# Altium PCB pulser.PcbDoc
Units mm, origin at the board's own origin, x right, y up, seen from the top; angles counter-clockwise.
Board outline 45.59 x 25.65 mm, 2 copper layers (Top Layer, Bottom Layer); 39 components, 24 nets, 111 pads, 25 vias.
Unrouted connection lines stored in the file: 7.
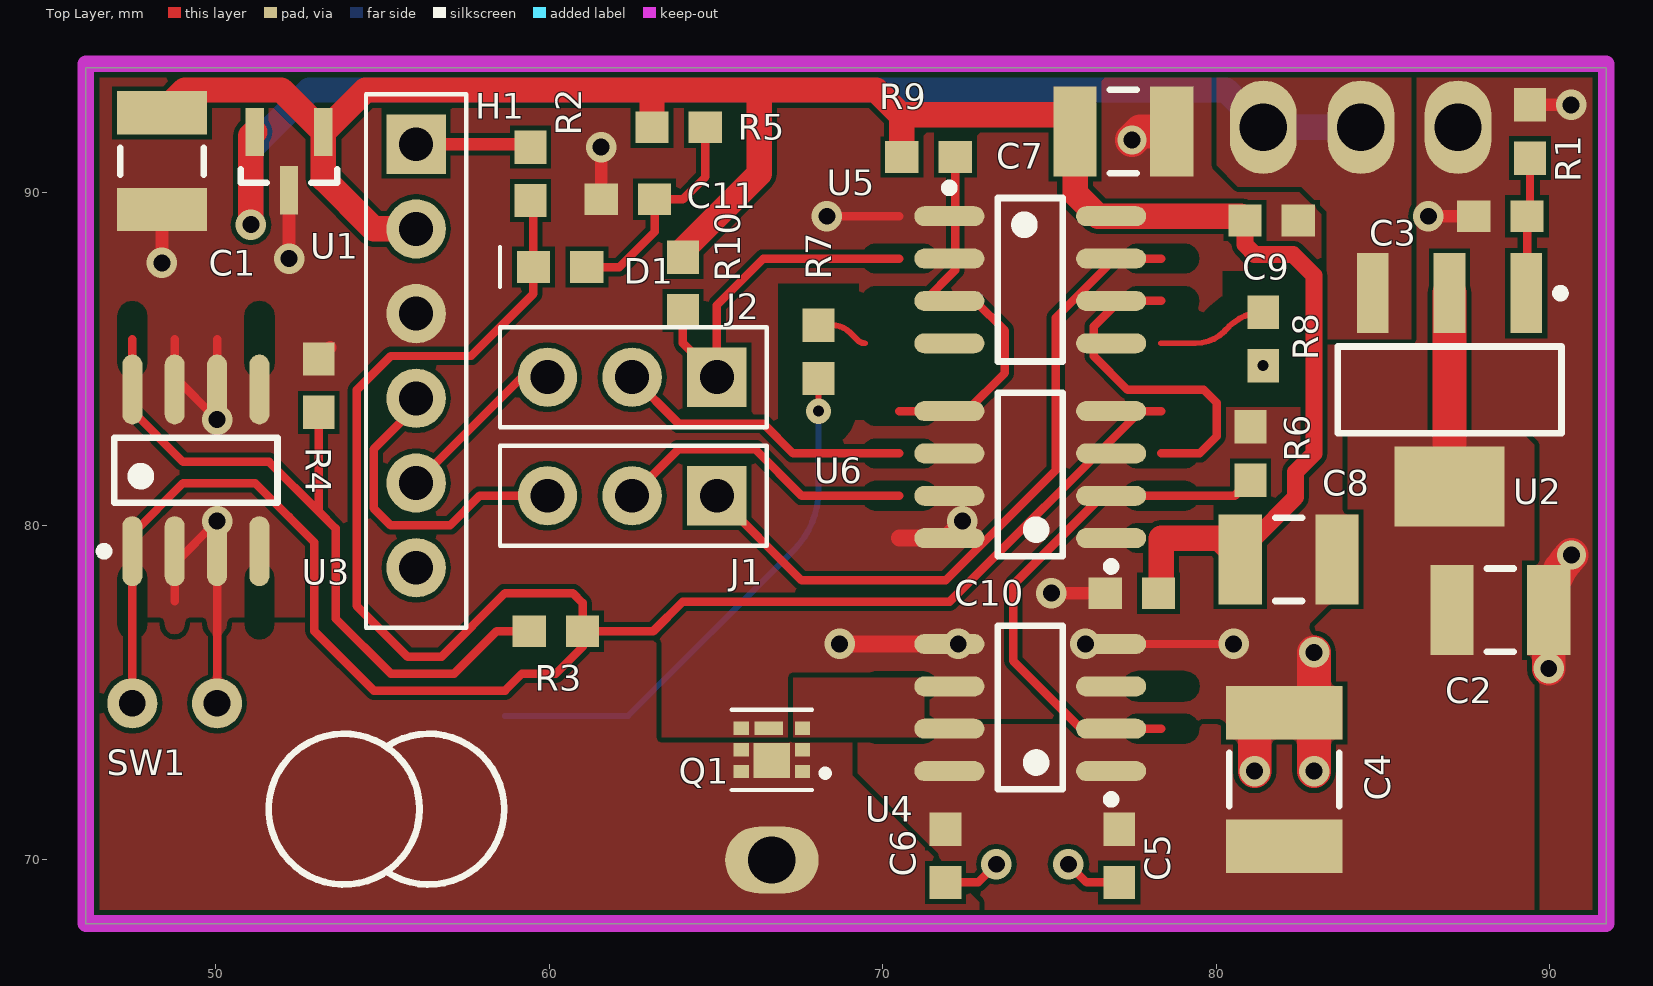
[diagram p0: Top Layer view]
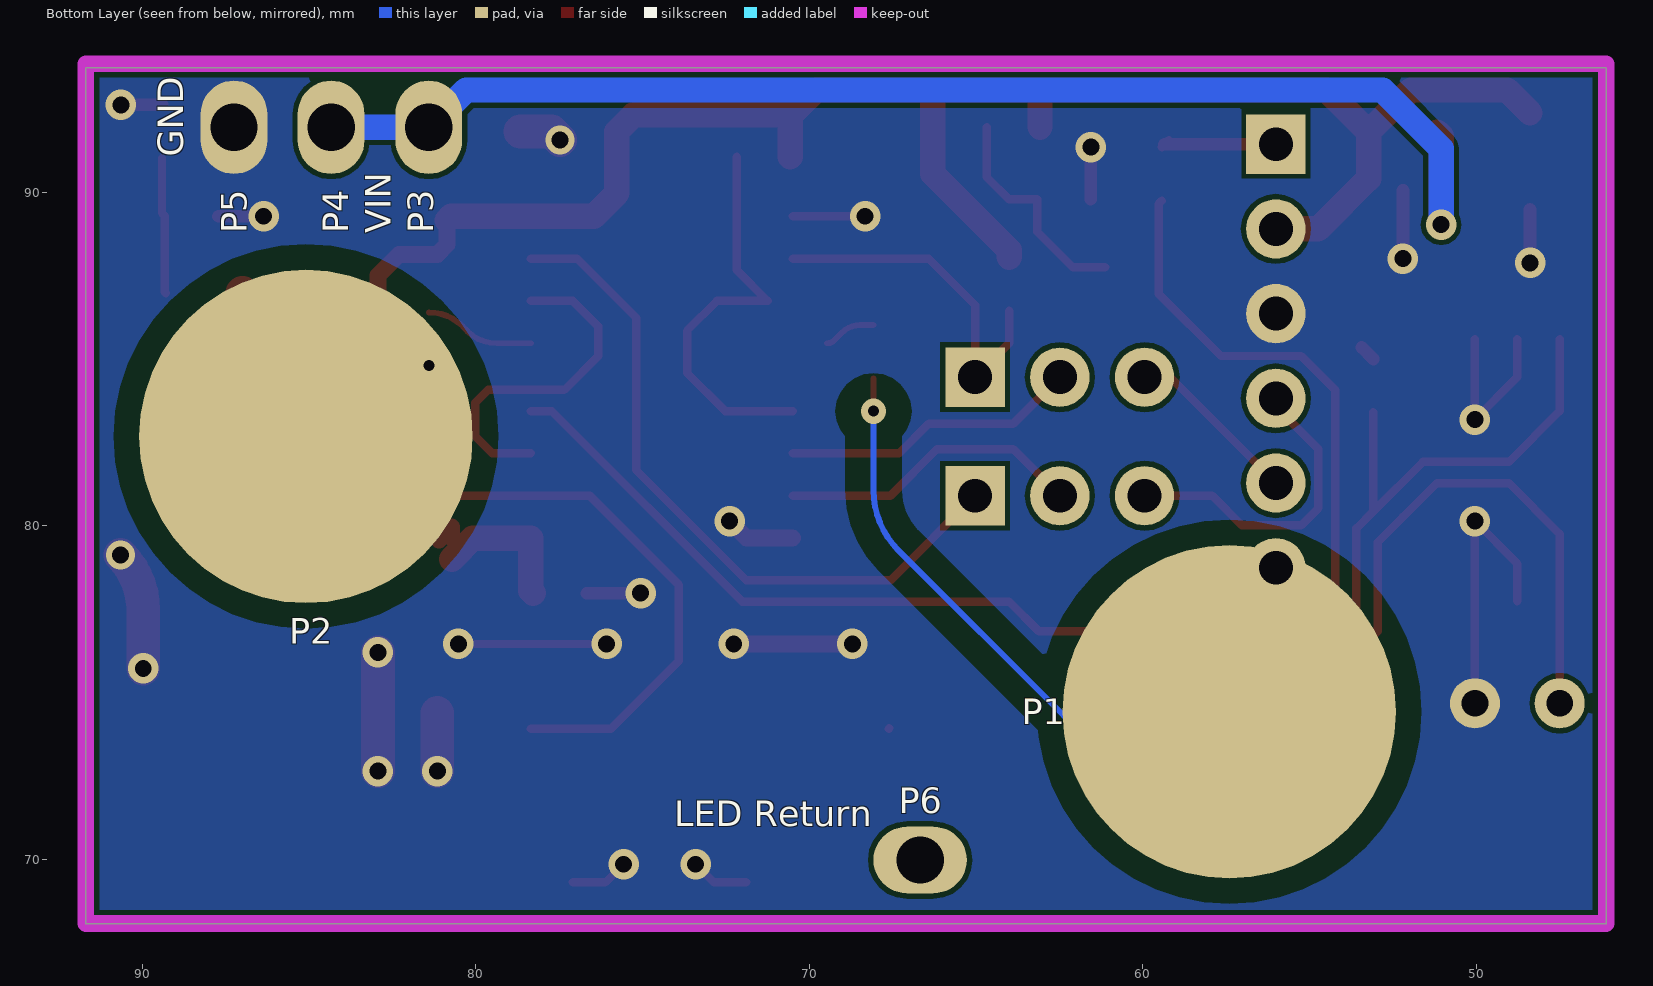
[diagram p1: Bottom Layer view, seen from below]

## Layer stack, top to bottom
Top Solder: solder mask 0.0102, Solder Resist, Dk 3.5
Top Layer: signal copper 0.0356
Dielectric1: core 0.32, FR-4, Dk 4.8
Bottom Layer: signal copper 0.0356
Bottom Solder: solder mask 0.0102, Solder Resist, Dk 3.5

## Board outline
91.694,68.072 91.694,93.726 46.101,93.726 46.101,68.072

## Design rules (kind name [scope] priority, off if disabled: settings)
Clearance ClearanceCapsense [InNetClass('capsense') vs not(InNetClass('capsense'))] p1: gap=0.75
Clearance [All] p2: gap=0.152
HoleSize [All] p1: absolutevalues=TRUE maxlimit=2.54 minlimit=0.33 maxpercent=80.000 minpercent=20.000
MinimumAnnularRing [All] p1: minimumring=0.178
PolygonConnect [All] p1: connectstyle=Direct reliefconductorwidth=0.254 reliefentries=4 polygonreliefangle="90 Angle" airgapwidth=0.254
RoutingVias [All] p1: holewidth=0.254 width=0.61 viastyle="Through Hole" minholewidth=0.254 minwidth=0.61 maxholewidth=0.711 maxwidth=1.27
SilkToSolderMaskClearance SilkscreenOverComponentPads [IsPad] p1: minsilkscreentomaskgap=0.254 clearancetoexposedcopper=TRUE
SolderMaskExpansion SolderMaskExpansion_via [IsVia] p1: expansion=-0.051
SolderMaskExpansion [All] p2: expansion=0.102
Width [All] p1: maxlimit=1.27 minlimit=0.152 preferedwidth=0.381
27 further rules are at their usual default settings.

## Classes and differential pairs
net class capsense: NetP1_1 NetP2_1 NetR7_1 NetR8_1

## Components (designator, comment, footprint, x,y, rotation, side; value= is the part's Value field where it differs from the comment)
C1 "Cap" SMD1210 48.387,90.932 r90 top
C2 "Cap" SMD1210 88.519,77.47 r180 top
C3 "Cap" SMD0603 88.519,89.281 r0 top
C4 "Cap" SMD1812 82.042,72.39 r270 top
C5 "Cap" SMD0603 77.089,70.104 r90 top
C6 "Cap" SMD0603 71.882,70.104 r90 top
C7 "Cap" SMD1210 77.216,91.821 r180 top
C8 "Cap" SMD1210 82.169,78.994 r180 top
C9 "Cap" SMD0603 81.661,89.154 r180 top
C10 "Cap" SMD0603 77.47,77.978 r0 top
C11 "Cap" SMD0603 62.357,89.789 r0 top
D1 "CD0603-B00340" "SMD0603 POLARIZED" 60.325,87.757 r0 top
H1 "6 pin header" "6 PIN HEADER" 56.007,91.44 r270 top
J1 "jumper" "3 PIN HEADER" 65.024,80.899 r180 top
J2 "jumper" "3 PIN HEADER" 65.024,84.455 r180 top
P1 "capsense pad" "CAPSENSE 1CM" 57.404,74.422 r180 bottom
P2 "capsense pad" "CAPSENSE 1CM" 85.09,82.677 r180 bottom
P3 "16AWG Solder Point" "16 AWG SOLDER POINT" 81.407,91.948 r180 bottom
P4 "16AWG Solder Point" "16 AWG SOLDER POINT" 84.337,91.948 r0 bottom
P5 "16AWG Solder Point" "16 AWG SOLDER POINT" 87.249,91.948 r180 bottom
P6 "16AWG Solder Point" "16 AWG SOLDER POINT" 66.675,69.977 r90 bottom
Q1 "CSD16301Q2" CSD16301Q2 66.675,73.279 r90 top
R1 "Res" SMD0603 89.408,91.821 r270 top
R2 "Res" SMD0603 59.436,90.551 r90 top
R3 "Res" SMD0603 60.198,76.835 r0 top
R4 "Res" SMD0603 53.086,84.201 r90 top
R5 "Res" SMD0603 63.881,91.948 r0 top
R6 "Res" SMD0603 81.026,82.169 r90 top
R7 "Res" SMD0603 68.072,85.217 r270 top
R8 "Res" SMD0603 81.407,85.598 r270 top
R9 "Res" SMD0603 71.374,91.059 r180 top
R10 "Res" SMD0603 64.008,87.249 r90 top
SW1 "GB215AH" GB215AH 48.768,74.676 r90 top
U1 "ZMR330" "SOT23 - DIODES" 52.197,90.932 r270 top
U2 "LT3080EST" SOT233 86.995,84.074 r270 top
U3 "LM431BCMX" "8 PIN SOIC" 49.403,81.661 r90 top
U4 "TC4452" "8 PIN SOIC" 74.422,74.549 r180 top
U5 "CY820121-SX1I" "8 PIN SOIC" 74.422,87.376 r0 top
U6 "PIC12F1840-I/SN" "8 PIN SOIC" 74.422,81.534 r180 top

## Footprints (in the part's own frame and the unit in brackets; to place one, negate y for a bottom-side part, rotate by r counter-clockwise, add the part's x,y. Pads: shape width x height; smd on the part's side, far side on the other; paste and mask are expansions set on the pad)
"3 PIN HEADER" [mil] "3 PIN 0.1\" header"
  rect 70x70 hole 40: 1(0,0)
  round 70 hole 40: 2(100,0) 3(200,0)
  silkscreen extent -59,-59 256,59
"6 PIN HEADER" [mil] "6 pin 0.1\" header"
  rect 70x70 hole 40: 1(0,0)
  round 70 hole 40: 2(100,0) 3(200,0) 4(300,0) 5(400,0) 6(500,0)
  silkscreen extent -59,-59 571,59
"8 PIN SOIC" [mm] "SOIC, 8-Leads"
  oval 2.1x0.6 smd: 1(-2.425,1.905) 2(-2.425,0.635) 3(-2.425,-0.635) 4(-2.425,-1.905) 5(2.425,-1.905) 6(2.425,-0.635) 7(2.425,0.635) 8(2.425,1.905)
  silkscreen extent -2.55,-2.45 0.98,2.88, body extent -1.95,-2.45 1.95,2.45, height 1.75
"16 AWG SOLDER POINT" [mm] "Solder Point for 16 AWG Wire"
  oval 2x2.8 hole 1.42: 1(0,0)
"CAPSENSE 1CM" [mm] "1cm diameter capsense pad"
  round 10 smd: 1(0,0)
CSD16301Q2 [mm] "N ch MOSFET"
  rect 0.4x0.46 smd mask+0: 1(-0.65,-0.92) 2(0,-0.92) 3(0.65,-0.92) 4(0.65,0.92) 5(0,0.92) 6(-0.65,0.92)
  rect 1.05x1.1 smd mask+0: 7(-0.325,0)
  rect 0.4x0.85 smd mask+0: 8(0.65,0.095)
  silkscreen extent -1.2,-1.7 1.2,1.2, body extent -1,-1 1,1, height 0.8
GB215AH [mm] "Through Hole Momentary Switch"
  round 1.5 hole 0.8: 1(0,1.27) 2(0,-1.27)
  body extent -1.25,-3.5 1.25,3.5, height 10.2
SMD0603 [mm] "0603 Surface Mount Chip"
  rect 1x0.95 smd: 1(-0.8,0) 2(0.8,0)
  body extent -0.88,-0.48 0.87,0.48, height 0.6
"SMD0603 POLARIZED" [mm] "0603 Surface Mount Chip"
  rect 1x0.95 smd: 1(-0.8,0) 2(0.8,0)
  silkscreen extent -1.8,-0.6 -1.8,0.6, body extent -0.88,-0.48 0.87,0.48, height 0.6
SMD1210 [mm] "Chip Capacitor, 2-Leads, Body 3.2x2.5mm, IPC Medium Density"
  rect 1.3x2.7 smd: 1(-1.45,0) 2(1.45,0)
  silkscreen extent -0.4,-1.25 0.4,1.25, body extent -1.7,-1.35 1.7,1.35, height 2.05
SMD1812 [mm] "Chip Capacitor, 2-Leads, Body 4.5x3.2mm, IPC Medium Density"
  rect 1.6x3.5 smd: 1(-2,0) 2(2,0)
  silkscreen extent -0.8,-1.65 0.8,1.65, body extent -2.4,-1.75 2.4,1.75, height 2
"SOT23 - DIODES" [mm] "Special SOT23 design for Diodes Part"
  rect 1.45x0.55 smd: 1(0.875,0) 2(-0.875,1.03) 3(-0.875,-1.03)
  silkscreen extent 0.25,-1.45 0.65,1.45, body extent -0.65,-1.45 0.65,1.45, height 1.05
SOT233 [mm] "SOT223, 4-Leads including Tab"
  rect 2.4x0.95 smd: 1(-2.9,2.3) 2(-2.9,0) 3(-2.9,-2.3)
  rect 2.4x3.3 smd: 4(2.9,0)
  silkscreen extent -3.02,-3.35 1.3,3.45, body extent -1.86,-3.35 1.86,3.35, height 1.8

## Part data
C1 C2 C3 C4 C5 C6 C7 C8 C9 C10 C11: "Capacitor"
D1: "Schottky Diode"
H1: "6 Pin Header"
J1 J2: "Three Pin Jumper"
P1 P2: library part "capsense pad 1", "circular capsense pad"
Q1: "N Ch. MOSFET"
R1 R2 R3 R4 R5 R6 R7 R8 R9 R10: "Resistor"
SW1: "SPST Normally Open Switch"
U1: "Diodes 3.3V LDO regulator, 50mA"
U2: "Adjustable Regulator, SOT-223 Package"
U3: "Adjustable Voltage Reference"
U4: "MOSFET Gate Driver, Low Side, Non Inverting 13A max"
U5: "Capsense Module, 2 button"
U6: "8 Bit RISC uController"

## Via types
v1: diameter 0.914, hole 0.508, Top Layer to Bottom Layer, 21 vias
v2: diameter 0.762, hole 0.33, Top Layer to Bottom Layer, 2 vias
v3: diameter 0.864, hole 0.508, Top Layer to Bottom Layer, 2 vias

## Nets (pads, with @x,y where several pads share a name; then routed paths per layer and width w, separated by ;. In a path a pad name is that pad's centre, name@x,y a point inside that pad or via, vN(x,y) a via of type N, cw(c..) or ccw(c..) an arc to the next point about the centre after c; other vN are vias at no path point)
3V3: C1.2 C7.2 C8.2 C9.2 C10.2 H1.2 R5.1 R9.2 R10.2 U1.2 U5.8 U6.1 | length 66.7
  Top Layer w0.508: C8.2@80.719,79.629 80.719,79.957 81.1,79.576 82.378,80.854 82.378,81.616 82.931,82.169 82.931,87.503 82.296,88.138 81.153,88.138 80.861,88.43 C9.2
  Top Layer w0.762: C1.2 49.071,93.066 51.968,93.066 U1.2 ; H1.2 54.737,88.9 53.227,90.41 U1.2 ; R5.1 63.081,92.977 62.992,93.066 ; R10.2 64.008,88.265 66.294,90.551 66.294,93.066 ; R9.2 70.574,92.291 ; C10.2 78.347,78.055 78.347,79.629 80.084,79.629 C8.2 ; C9.2 80.734,89.281 76.454,89.281 75.766,89.969 C7.2 75.258,92.329 70.612,92.329 70.574,92.291 ; U1.2 54.486,93.066 62.992,93.066 ; 62.992,93.066 66.294,93.066 ; 66.294,93.066 69.799,93.066 70.574,92.291
9V0: C2.2 C4.2 C5.2 C6.2 U2.2 U2.4 U4.1 U4.8 | length 5.8
  Top Layer w1.016: U2.4 U2.2
GND: C1.1 C2.1 C3.1 C4.1 C5.1 C6.1 C7.1 C8.1 C9.1 C10.1 C11.1 H1.3 P5.1 Q1.4 Q1.8 R1.1 R4.2 R6.2 SW1.2 U1.1 U3.2 U3.3 U3.6 U3.7 U4.4 U4.5 U5.1 U6.8 | length 49.5
  Top Layer w0.254: 48.768,77.736 48.768,78.867 v1(50.038,80.137) 50.038,77.736 SW1.2 ; 48.768,85.586 48.768,84.455 v1(50.038,83.185) 50.038,85.586 ; v1(68.326,89.281) 70.497,89.281 ; C6.1 72.86,69.304 v1(73.406,69.85) ; v1(75.565,69.85) 76.111,69.304 C5.1 ; v1(76.073,76.454) 78.347,76.454 v1(80.518,76.454)
  Top Layer w0.381: v1(48.387,87.884) C1.1 ; v1(52.197,88.011) U1.1 ; R4.2 R4.2@53.429,85.344 ; C11.1 v1(61.557,91.351) ; v1(75.057,77.978) C10.1 ; v1(86.36,89.281) C3.1 ; R1.1 v1(90.64,92.621)
  Top Layer w0.508: v1(68.707,76.454) 70.497,76.454 v1(72.263,76.454) ; 70.497,79.629 71.882,79.629 v1(72.39,80.137)
  Top Layer w1.016: v3(77.47,91.567) 77.724,91.821 C7.1 ; v1(81.153,72.644) C4.1@81.153,74.39 ; v1(82.931,72.644) C4.1@82.931,74.39 ; C4.1@82.931,74.454 v1(82.931,76.2) ; v1(89.969,75.724) C2.1 cw(c92.305,77.47) v3(90.653,79.121)
ICSPCLK: H1.5 J2.3 | length 5.3
  Top Layer w0.254: H1.5 59.182,84.455 J2.3
ICSPDAT: H1.4 J1.3 | length 9.6
  Top Layer w0.254: H1.4 56.007,83.566 54.737,82.296 54.737,80.518 55.245,80.01 57.023,80.01 57.912,80.899 J1.3
LED_RET: P6.1 Q1.1 Q1.2 Q1.5 Q1.6 Q1.7
NetC3_2: C3.2 R1.2 U2.1 | length 4.1
  Top Layer w0.254: U2.1 89.319,86.998 C3.2 89.408,89.37 R1.2
NetC11_2: C11.2 D1.2 R5.2 | length 6.7
  Top Layer w0.254: D1.2 62.103,87.757 63.157,88.811 C11.2 64.008,89.789 64.681,90.462 R5.2
NetD1_1: D1.1 R2.1 R3.2 SW1.1 U3.1 U6.4 | length 69.4
  Top Layer w0.254: SW1.1 47.498,79.756 49.022,81.28 51.181,81.28 52.197,80.264 52.959,79.502 52.959,76.835 54.737,75.057 58.674,75.057 59.182,75.565 60.198,75.565 60.998,76.365 R3.2 ; R2.1 59.525,89.662 D1.1 59.525,86.957 57.658,85.09 55.245,85.09 54.229,84.074 54.229,77.597 55.753,76.073 56.769,76.073 58.674,77.978 60.706,77.978 60.998,77.686 R3.2 ; 78.347,83.439 77.724,83.439 72.009,77.724 64.008,77.724 63.119,76.835 R3.2
NetJ1_1: J1.1 U5.7 | length 21.1
  Top Layer w0.254: J1.1 67.564,78.359 71.882,78.359 75.184,81.661 75.184,86.233 76.962,88.011 78.347,88.011
NetJ1_2: J1.2 U6.7 | length 9.2
  Top Layer w0.254: J1.2 63.881,82.296 66.167,82.296 67.564,80.899 70.497,80.899
NetJ2_1: J2.1 R10.1 U5.2 | length 10.6
  Top Layer w0.254: R10.1 64.008,85.471 J2.1 65.024,86.614 66.421,88.011 70.497,88.011
NetJ2_2: J2.2 U6.6 | length 9
  Top Layer w0.254: J2.2 63.881,83.058 66.421,83.058 67.31,82.169 70.497,82.169
NetP1_1: P1.1 R7.2 | length 16.1
  Top Layer w0.178: v2(68.072,83.439) R7.2
  Bottom Layer w0.178: P1.1@58.674,74.295 62.357,74.295 67.328,79.266 ccw(c65.532,81.062) 68.072,81.062 v2(68.072,83.439)
NetP2_1: P2.1 R8.2
  other v2: 81.407,84.798
NetQ1_3: Q1.3 U4.6 U4.7 | length 0
  Top Layer w0.254: Q1.3 Q1.3@67.61,73.914
NetR3_1: R3.1 R4.1 U3.8 | length 22.4
  Top Layer w0.254: 47.498,85.586 47.498,83.439 49.022,81.915 51.6,81.915 53.086,80.429 ; R4.1 53.086,80.429 ; R3.1 58.42,76.835 57.15,75.565 55.245,75.565 53.594,77.216 53.594,79.921 53.086,80.429
NetR6_1: R6.1 U4.2 U6.2 | length 16
  Top Layer w0.254: 78.347,73.914 75.946,73.914 73.914,75.946 73.914,78.232 76.581,80.899 78.347,80.899 80.556,80.899 R6.1
NetR7_1: R7.1 U5.4 | length 1.6
  Top Layer w0.178: R7.1 68.473,86.017 cw(c68.473,85.238) 69.024,85.789 69.252,85.561 ; 69.252,85.561 ccw(c69.469,85.778) 69.469,85.471
NetR8_1: R8.1 U5.5 | length 3.3
  Top Layer w0.178: 78.347,85.471 79.375,85.471 ccw(c79.375,86.697) 80.242,85.83 80.388,85.976 cw(c81.407,84.957) R8.1
NetR9_1: R9.1 U5.3 U6.5 | length 12.4
  Top Layer w0.254: 70.497,83.439 72.517,83.439 73.66,84.582 73.66,85.852 72.771,86.741 71.247,86.741 72.174,87.668 R9.1
NetU5_6: U5.6 U6.3 | length 10.4
  Top Layer w0.254: 78.347,82.169 79.502,82.169 80.01,82.677 80.01,83.693 79.629,84.074 77.343,84.074 76.327,85.09 76.327,85.979 77.089,86.741 78.347,86.741
VIN+: P3.1 P4.1 U1.3 U2.3 | length 39.6
  Top Layer w0.762: v1(51.054,89.027) 51.054,91.694 U1.3
  Bottom Layer w0.762: v1(51.054,89.027) 51.054,91.313 52.807,93.066 80.289,93.066 P3.1 P4.1
VPP: H1.1 R2.2 | length 3.6
  Top Layer w0.254: R2.2@59.22,91.567 59.347,91.44 R2.2
  Top Layer w0.381: H1.1 R2.2@59.347,91.44
pads on no net: H1.6 U3.4 U3.5 U4.3

## Polygon pours and split planes (outlines as drawn)
VIN+ on Top Layer "Vin" (solid, remove dead copper, pour order 14): 85.852,93.853 85.852,85.598 83.312,85.598 83.312,89.408 82.804,89.916 82.55,90.17 81.026,90.17 80.645,90.17 80.01,90.805 80.01,93.853
NetQ1_3 on Top Layer "Gate" (solid, remove dead copper, pour order 2): 67.31,73.66 71.247,73.66 71.247,75.438 67.31,75.438
GND on Top Layer "Source" (solid, remove dead copper, pour order 4): 71.247,73.66 71.247,77.343 63.373,77.343 63.373,73.66
LED_RET on Top Layer "Drain" (solid, remove dead copper, pour order 10): 46.355,77.089 69.088,77.089 69.088,72.517 72.898,68.707 72.898,68.072 46.355,68.072
9V0 on Top Layer "9V" (solid, remove dead copper, pour order 16): 83.947,82.677 83.947,77.978 80.01,74.041 69.215,74.041 69.215,71.882 70.231,70.866 72.771,68.326 74.168,68.326 89.408,68.326 89.535,68.199 89.535,82.423 89.281,82.677
GND on Top Layer "Top Gnd" (solid, remove dead copper, pour order 20): 46.101,93.853 46.101,68.072 91.694,68.072 91.694,93.853
GND on Bottom Layer "Bot Gnd" (solid, remove dead copper, pour order 18): 46.101,93.853 46.101,68.072 91.694,68.072 91.694,93.853

## Keep-outs
Keep-Out Layer:
  lines w0.508: 46.101,68.072 46.101,93.853 91.694,93.853 91.694,68.072 46.101,68.072

## Silkscreen, mask and mechanical layers (free items; w line width, h text height)
Top Overlay:
  circle w0.203: c53.848,71.501 r2.261
  lines w0.203: 55.134,69.62 ccw(c56.388,71.501) 55.134,73.382
Bottom Overlay:
  text "GND" at 88.773,91.059 h0.76 r270
  text "VIN" at 82.55,88.773 h0.76 r270
  text "LED Return" at 74.041,70.993 h0.76
Top Solder:
  rectangle: 63.754,73.914 66.802,75.819
  rectangle: 67.564,73.914 70.739,75.184
  rectangle: 65.532,70.739 67.818,72.644